# EAGLE board PCB-VU-SE-2 (EAGLE 6.4)
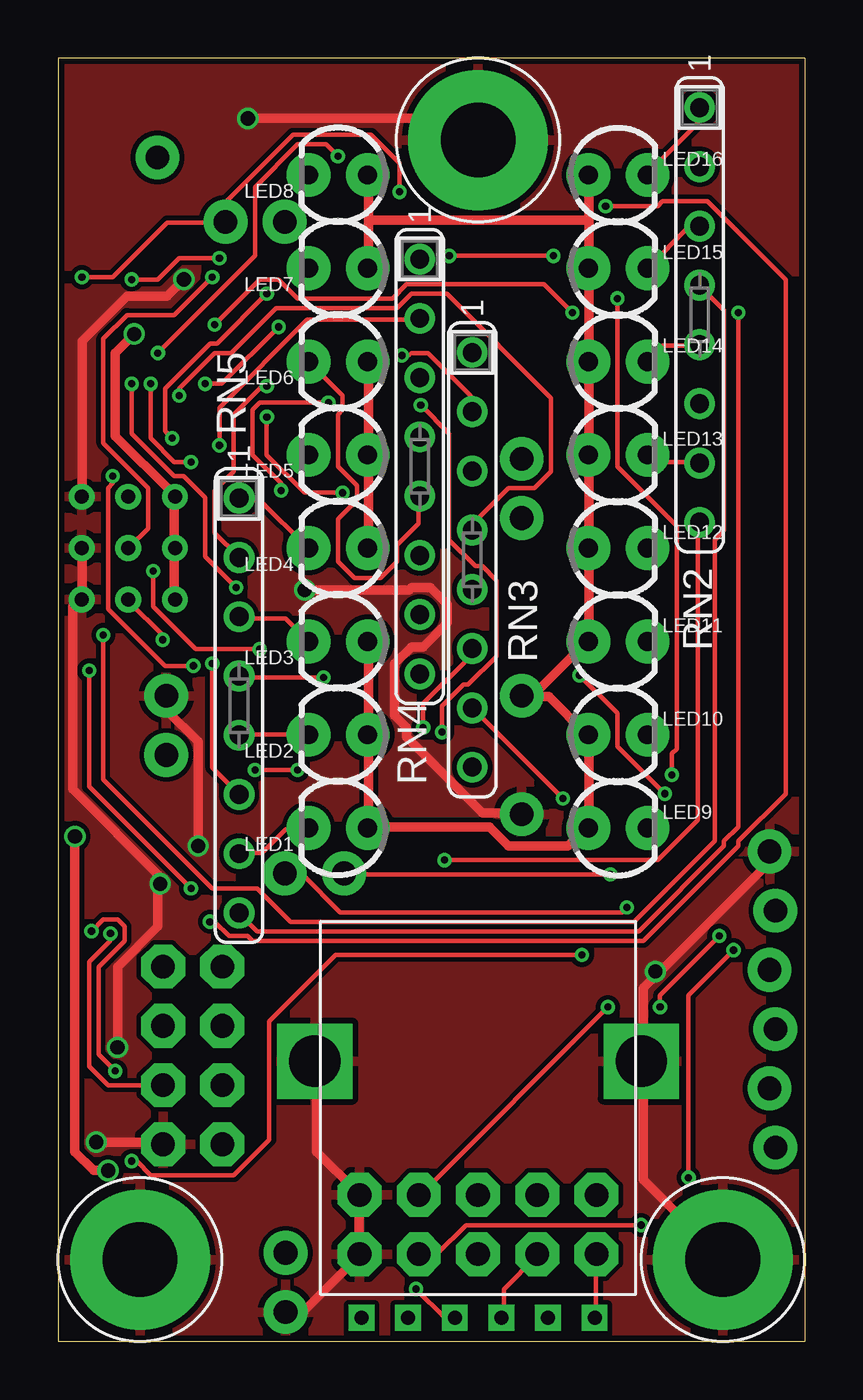
[diagram p0: board, top side]
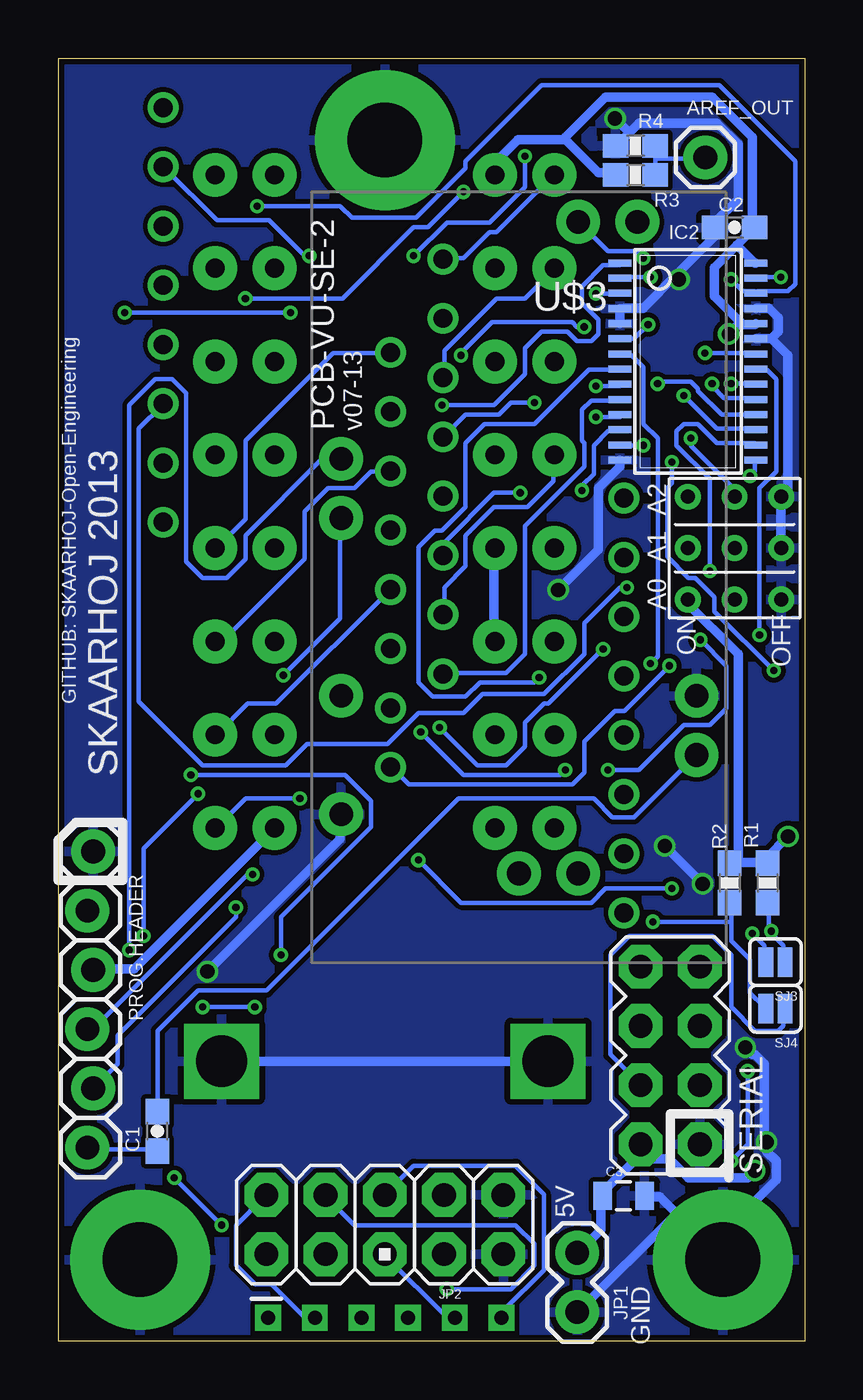
[diagram p1: board, bottom side, seen from below]

Size 32 x 55 mm. Coordinates in mm from the lower left corner, seen from the top.
Outline: 0,0 32,0 32,55 0,55 0,0
Copper layers (1*16): Top 0.035mm / dielectric 1.5mm / Bottom 0.035mm
Design rules "Fusion_eagle_rule_v1.1": minimum track width 6mil, minimum drill 12mil, track to track 6mil, track to pad 6mil, pad to pad 6mil, via to via 6mil, smd to smd 0mil, copper to edge 10mil, drill to drill 10mil, minimum pad ring 10mil, minimum via ring 6mil, stop-mask expansion 2mil, vias tented up to drill 100mil, thermal gap 10mil
Net classes: 0 default: width 0.203 mm, drill 0.305 mm, clearance 0.203 mm; 1 Power: width 0.406 mm, drill 0.61 mm, clearance 0.203 mm

## Footprints (pad centres in the part's own frame; a part is rotated, then mirrored left to right if it is on the bottom)
1X01 = drill 1.016 pad 1.88: 1 0,0
0603-CAP = smd 1.1 x 1: 1 -0.85,0; 2 0.85,0
0805 = smd 0.8 x 1.2: 1 -0.9,0; 2 0.9,0
TSSOP28 = smd 0.305 x 0.991: 1 -4.225,-2.918; 2 -3.575,-2.918; 3 -2.925,-2.918; 4 -2.275,-2.918; 5 -1.625,-2.918; 6 -0.975,-2.918; 7 -0.325,-2.918; 8 0.325,-2.918; 9 0.975,-2.918; 10 1.625,-2.918; 11 2.275,-2.918; 12 2.925,-2.918; 13 3.575,-2.918; 14 4.225,-2.918; 15 4.225,2.918; 16 3.575,2.918; 17 2.925,2.918; 18 2.275,2.918; 19 1.625,2.918; 20 0.975,2.918; 21 0.325,2.918; 22 -0.325,2.918; 23 -0.975,2.918; 24 -1.625,2.918; 25 -2.275,2.918; 26 -2.925,2.918; 27 -3.575,2.918; 28 -4.225,2.918
1X02 = drill 1.016 pad 1.88: 1 0,0; 2 2.54,0
AVR_ICSP = drill 1.016 pad 1.88 octagon: 1 -1.27,5.08; 2 1.27,5.08; 3 -1.27,2.54; 4 1.27,2.54; 5 -1.27,0; 6 1.27,0; 7 -1.27,-2.54; 8 1.27,-2.54; 9 -1.27,-5.08; 10 1.27,-5.08
LED3MM = drill 0.813 pad 1.88: A -1.27,0; K 1.27,0
1X06_LOCK = drill 1.016 pad 1.88: 1 0,0; 2 2.54,-0.254; 3 5.08,0; 4 7.62,-0.254; 5 10.16,0; 6 12.7,-0.254
0603-RES = smd 1.1 x 1: 1 -0.85,0; 2 0.85,0
SIL8 = drill 0.813: 1 -8.89,0; 2 -6.35,0; 3 -3.81,0; 4 -1.27,0; 5 1.27,0; 6 3.81,0; 7 6.35,0; 8 8.89,0
2X4 = drill 1.016 pad 1.88 octagon: 1 -3.81,-1.27; 2 -3.81,1.27; 3 -1.27,-1.27; 4 -1.27,1.27; 5 1.27,-1.27; 6 1.27,1.27; 7 3.81,-1.27; 8 3.81,1.27
SJ_2S = smd 0.635 x 1.27: 1 -0.412,0; 2 0.412,0
BEHRINGER_100K_POT = drill 2.2 square: GND1 -7,0; GND2 7,0 | drill 0.6 square: PAD1 -5,-11; PAD2 -3,-11; PAD3 -1,-11; PAD4 1,-11; PAD5 3,-11; PAD6 5,-11
ARDUINO_MINI_SE1 = drill 1.016 pad 1.88: 1 -7.62,7.62; 4 -7.62,5.08; 5 0,12.7; 6 -2.54,12.7; 8 -2.54,-15.24; 9 -5.08,-15.24; 17 7.62,-5.08; 18 7.62,-2.54; 21 7.62,5.08; 23 7.62,10.16
3.2MMPAD6MM = drill 3.2 pad 6: P$1 0,0
3BITADDR = drill 0.6: A0 -2.2,0; A1 0,0; A2 2.2,0; H1 -2.2,2; H2 0,2; H3 2.2,2; L1 -2.2,-2; L2 0,-2; L3 2.2,-2

## Placement (x,y rotation side)
AREF_OUT  M01PTH  [1X01]  4.25,50.75 0 bottom
C1  100nF  [0603-CAP]  27.75,9 90 bottom
C2  100nF  [0603-CAP]  3,47.75 180 bottom
C3  10uF  [0805]  7.76,6.23 0 bottom
IC2  PCA9685  [TSSOP28]  5,42 270 bottom
JP1  [1X02]  9.75,1.25 90 bottom
JP2  M05X2PTH  [AVR_ICSP]  18,5 90 bottom
LED1  [LED3MM]  12,22 180 top
LED2  [LED3MM]  12,26 180 top
LED3  [LED3MM]  12,30 180 top
LED4  [LED3MM]  12,34 180 top
LED5  [LED3MM]  12,38 180 top
LED6  [LED3MM]  12,42 180 top
LED7  [LED3MM]  12,46 180 top
LED8  [LED3MM]  12,50 180 top
LED9  [LED3MM]  24,22 0 top
LED10  [LED3MM]  24,26 0 top
LED11  [LED3MM]  24,30 0 top
LED12  [LED3MM]  24,34 0 top
LED13  [LED3MM]  24,38 0 top
LED14  [LED3MM]  24,42 0 top
LED15  [LED3MM]  24,46 0 top
LED16  [LED3MM]  24,50 0 top
PROG.HEADER  [1X06_LOCK]  30.5,21 270 bottom
R1  1K5  [0603-RES]  1.58,19.65 270 bottom
R2  1K5  [0603-RES]  3.21,19.65 270 bottom
R3  [0603-RES]  7.25,50 180 bottom
R4  [0603-RES]  7.25,51.25 0 bottom
RN2  [SIL8]  27.5,44 270 top
RN3  [SIL8]  17.75,33.5 270 top
RN4  [SIL8]  15.5,37.5 270 top
RN5  [SIL8]  7.75,27.25 270 top
SERIAL  M04X2  [2X4]  5.76,12.25 90 bottom
SJ3  SOLDERJUMPERNC  [SJ_2S]  1.25,16.25 180 bottom
SJ4  SOLDERJUMPERNC  [SJ_2S]  1.25,14.25 180 bottom
U$2  BEHRINGER_100K_POT  [BEHRINGER_100K_POT]  18,12 0 top
U$3  ARDUINO_MINI_SE1  [ARDUINO_MINI_SE1]  12.25,32.75 180 bottom
U$15  GNDPAD6MM  [3.2MMPAD6MM]  28.5,3.5 0 top
U$18  GNDPAD6MM  [3.2MMPAD6MM]  3.5,3.5 0 top
U$19  3BITADDR  [3BITADDR]  3,34 90 bottom
U$20  GNDPAD6MM  [3.2MMPAD6MM]  18,51.5 0 top

## Library data of the parts
AREF_OUT C1-C3 JP1 JP2 LED1-LED16 PROG.HEADER R1-R4 SERIAL SJ3 SJ4 = SparkFun
IC2 = wsmith
RN2-RN5 = SKAARHOJ; OC_FARNELL: unknown; OC_NEWARK: unknown
U$2 U$3 U$15 U$18-U$20 = SKAARHOJ

## Nets
5V [Power]: C2.1 C3.1 IC2.24 IC2.28 JP1.2 LED1.A LED2.A LED3.A LED4.A LED5.A LED6.A LED7.A LED8.A LED9.A LED10.A LED11.A LED12.A LED13.A LED14.A LED15.A LED16.A PROG.HEADER.3 R1.1 R2.1 R3.2 SERIAL.2 U$3.21 U$19.H1 U$19.H2 U$19.H3
A0: IC2.1 U$19.A0
A1: IC2.2 U$19.A1
A2: IC2.3 U$19.A2
AREF: AREF_OUT.1 R3.1 R4.2
DISP_DATA_OUT: SERIAL.6
GND [Power]: C2.2 C3.2 IC2.4 IC2.5 IC2.14 IC2.23 IC2.25 JP1.1 JP2.9 JP2.10 PROG.HEADER.1 R4.1 SERIAL.1 U$2.GND1 U$2.GND2 U$3.4 U$3.23 U$15.P$1 U$18.P$1 U$19.L1 U$19.L2 U$19.L3 U$20.P$1
I2C_SCL: IC2.26 R2.2 SJ4.2 U$3.8
I2C_SDA: IC2.27 R1.2 SJ3.1 U$3.9
L0: LED1.K RN5.7
L1: LED2.K RN5.5
L2: LED3.K RN5.3
L3: LED4.K RN5.1
L4: LED5.K RN4.7
L5: LED6.K RN4.5
L6: LED7.K RN4.3
L7: LED8.K RN4.1
L8: LED9.K RN3.7
L9: LED10.K RN3.5
L10: LED11.K RN3.3
L11: LED12.K RN3.1
L12: LED13.K RN2.7
L13: LED14.K RN2.5
L14: LED15.K RN2.3
L15: LED16.K RN2.1
N$1: JP2.6 U$2.PAD1
N$2: JP2.4 U$2.PAD3
N$3: SERIAL.3 SJ3.2
N$4: IC2.13 RN4.2
N$5: IC2.12 RN4.4
N$6: SERIAL.4 SJ4.1
N$7: IC2.11 RN4.6
N$8: JP2.3 U$2.PAD4
N$9: IC2.10 RN4.8
N$10: IC2.9 RN5.2
N$11: IC2.8 RN5.4
N$12: IC2.7 RN5.6
N$13: JP2.2 U$2.PAD5
N$14: JP2.5 U$2.PAD2
N$15: JP2.1 U$2.PAD6
N$16: JP2.8 U$3.18
N$17: JP2.7 U$3.17
N$19: IC2.6 RN5.8
N$20: IC2.15 RN3.8
N$21: IC2.16 RN3.6
N$22: IC2.17 RN3.4
N$23: IC2.18 RN3.2
N$24: IC2.19 RN2.8
N$25: IC2.20 RN2.6
N$26: IC2.21 RN2.4
N$27: IC2.22 RN2.2
N$37: C1.2 U$3.1
PH6: C1.1 PROG.HEADER.6
RX: PROG.HEADER.4 U$3.5
SDI_MOSI: SERIAL.8
SDI_SCLK: SERIAL.7
SLIDER_IN: SERIAL.5
TX: PROG.HEADER.5 U$3.6

## Tracks (layer width: path | path; a pad name or v marks a point on that pad's centre or on a via)
5V  (via drill 0.61)
  Top 0.406: U$19.H1 4.98,31.8 4.98,33.83 U$19.H2 4.98,34.04 4.98,36.17 U$19.H3 4.88,36.37 2.44,38.81 2.44,42.37 v3.25,43.18 | v2.13,7.32 1.52,7.32 0.71,8.13 v0.71,21.64 | LED6.A 13.31,41.96 13.31,38.1 LED5.A 13.31,37.9 13.31,34.04 LED4.A | LED3.A 13.31,29.97 13.31,26.11 LED2.A 13.31,25.91 13.31,22.05 LED1.A 13.51,22.05 18.49,22.05 19.3,21.23 21.84,21.23 22.55,21.95 LED9.A 22.76,22.05 22.76,25.81 LED10.A 22.66,26.01 21.03,27.64 19.91,27.64 U$3.21 20.42,27.74 22.66,29.97 LED11.A 22.76,30.18 22.76,33.93 LED12.A 22.76,34.14 22.76,38 LED13.A 22.76,38.2 22.76,41.96 LED14.A 22.76,42.16 22.76,45.92 LED15.A 22.76,46.13 22.76,48.06 | 13.31,48.06 13.31,49.99 LED8.A | 13.31,48.06 13.31,46.02 LED7.A | 22.76,48.06 22.76,49.99 LED16.A | 22.76,48.06 13.31,48.06
  Bottom 0.406: JP1.2 9.65,3.86 8.74,4.78 8.74,6.2 C3.1 8.64,6.4 7.11,7.92 7.11,8.43 SERIAL.2 7.01,7.82 5.79,7.82 4.98,7.01 2.44,7.01 v2.13,7.32 | U$19.H1 5.08,31.7 2.85,29.46 2.85,20.62 R2.1 3.15,20.52 1.63,20.52 R1.1 1.63,20.73 v0.71,21.64 | LED3.A 13.31,30.07 13.31,33.93 LED4.A | 2.74,43.69 3.86,44.81 3.86,46.02 2.9,46.99 | 2.74,43.69 2.64,43.59 2.13,43.59 IC2.24 | 2.9,46.99 2.23,47.65 C2.1 2.23,47.85 2.23,51.61 3.96,53.34 8.53,53.34 10.26,51.61 10.26,51.51 | 2.9,46.99 2.13,46.23 IC2.28 | 10.26,51.51 8.84,50.09 8.13,50.09 R3.2 | 10.26,51.51 12.29,51.51 13.21,50.6 13.21,50.09 LED8.A | PROG.HEADER.3 30.48,15.95 28.75,15.95 22.76,21.95 LED9.A | 2.74,43.69 v3.25,43.18
A0  (via drill 0.3)
  Top 0.203: v15.54,40.13 16.76,38.91 16.76,34.34 17.88,33.22 18.19,33.22 18.8,32.61 18.8,29.36 17.58,28.14 17.37,28.14 16.46,27.23 v16.46,26.11 | v8.43,24.49 v10.26,24.49 | v4.47,30.07 4.47,30.28 3.05,31.7 U$19.A0
  Bottom 0.203: v15.54,40.13 13.31,40.13 11.99,41.45 11.99,42.57 11.28,43.28 10.16,43.28 9.75,42.88 9.14,42.88 8.84,43.18 8.84,43.79 9.55,44.5 9.55,45.21 8.64,46.13 7.92,46.13 IC2.1 | v16.46,26.11 14.63,24.28 10.46,24.28 v10.26,24.49 | v8.43,24.49 7.11,24.49 5.18,26.42 4.06,26.42 3.35,27.13 3.35,28.96 v4.47,30.07
A1  (via drill 0.3)
  Top 0.203: v6.6,45.62 4.98,43.99 2.95,43.99 1.93,42.98 1.93,38.51 3.86,36.58 3.86,34.85 3.05,34.04 U$19.A1
  Bottom 0.203: v6.6,45.62 7.82,45.62 IC2.2
A2  (via drill 0.3)
  Top 0.203: v8.94,44.91 6.81,42.77 6.5,42.77 4.57,40.84 4.57,39.01 v4.88,38.71
  Bottom 0.203: v8.94,44.91 7.92,44.91 IC2.3 | v4.88,38.71 4.88,38.41 3.05,36.58 3.05,36.27 U$19.A2
AREF
  Bottom 0.203: 6.4,50.7 6.4,51.21 R4.2 | 6.4,50.7 6.4,50.09 R3.1 | 6.4,50.7 4.27,50.7 AREF_OUT.1
GND  (via drill 0.61)
  Top 0.406: U$19.L2 1.02,33.93 1.02,31.8 U$19.L1 0.81,31.7 0.61,31.5 0.61,23.67 4.37,19.91 v4.37,19.61 4.27,19.51 4.27,17.78 2.54,16.05 v2.54,12.6 | v5.99,21.23 5.99,25.7 4.67,27.03 4.67,27.64 U$3.4 | v8.13,52.43 17.07,52.43 17.98,51.51 U$20.P$1 | v5.38,45.52 4.67,44.81 2.95,44.81 1.02,42.88 1.02,36.27 U$19.L3 | JP1.1 9.75,1.32 10.57,1.32 12.9,3.66 JP2.9 12.9,3.86 12.9,6.2 JP2.10 12.8,6.4 11.07,8.13 11.07,11.99 U$2.GND1 | v1.63,8.53 4.47,8.53 SERIAL.1 | v10.57,32.21 15.04,32.21 15.14,32.31 15.95,32.31 16.66,31.6 16.66,30.79 15.65,29.77 15.14,29.77 14.43,29.06 14.43,26.82 14.94,26.31 14.94,25.91 18.19,22.66 19.81,22.66 U$3.23 | 25.7,15.75 25.09,15.14 25.09,12.09 U$2.GND2 25.09,11.89 25.09,6.91 28.45,3.56 U$15.P$1 | 25.7,15.75 30.48,20.52 30.48,20.93 PROG.HEADER.1 | v25.6,15.85 25.7,15.75
  Bottom 0.406: 1.42,42.98 2.03,42.98 IC2.23 | 1.42,42.98 1.12,43.28 1.12,43.89 1.52,44.3 2.03,44.3 IC2.25 | 1.42,42.98 0.71,42.27 0.71,36.47 0.91,36.27 U$19.L3 1.02,36.07 1.02,34.04 U$19.L2 | v4.37,19.61 v5.99,21.23 | IC2.5 7.92,43.69 7.92,44.2 IC2.4 7.72,44.3 6.91,44.3 5.49,45.72 | 5.49,45.72 3.86,47.35 3.86,47.65 C2.2 3.86,47.95 2.85,48.97 2.85,51.31 3.76,52.22 7.11,52.22 7.52,51.82 | 7.52,51.82 8.03,51.31 R4.1 | v8.13,52.43 7.52,51.82 | v5.38,45.52 5.38,45.62 5.49,45.72 | U$18.P$1 6.2,6.2 6.81,6.2 C3.2 | U$18.P$1 3.96,4.17 1.22,6.91 1.22,7.72 1.63,8.13 v1.63,8.53 1.73,8.64 1.73,11.89 2.13,12.29 2.23,12.29 v2.54,12.6 | JP1.1 9.65,1.32 5.59,5.38 U$18.P$1 | v10.57,32.21 8.84,33.93 8.84,36.58 7.92,37.49 7.92,37.69 IC2.14 | v25.6,15.85 19.91,21.54 19.91,22.55 U$3.23 | U$2.GND1 11.07,11.99 U$2.GND2
  pour Top: 0,0 32,0 32,55 0,55
  pour Bottom: 0,0 32,0 32,55 0,55
I2C_SCL  (via drill 0.3)
  Top 0.203: v3.15,45.52 4.27,45.52 5.18,46.43 v6.91,46.43 | v6.5,17.98 6.71,17.98 7.32,17.37 8.13,17.37 8.33,17.17 25.09,17.17 29.16,21.23 29.16,21.44 31.19,23.47 31.19,45.52 27.84,48.87 25.91,48.87 25.7,48.67 v23.47,48.67
  Bottom 0.203: 3.15,17.98 3.15,17.17 2.34,16.36 2.34,14.94 1.73,14.33 SJ4.2 | 3.15,17.98 3.15,18.69 R2.2 | v3.15,45.52 2.64,45.01 2.13,45.01 IC2.26 2.03,45.01 0.71,45.01 0.41,45.31 0.41,50.6 3.66,53.85 11.28,53.85 14.53,50.6 14.53,50.29 16.66,48.16 19.41,48.16 19.91,48.67 v23.47,48.67 | v6.91,46.43 7.21,46.74 8.43,46.74 9.65,47.95 U$3.8 | v6.5,17.98 3.15,17.98
I2C_SDA  (via drill 0.3)
  Top 0.203: v1.02,45.62 2.34,45.62 4.67,47.95 6.3,47.95 | 6.3,47.95 7.11,47.95 U$3.9 6.3,47.95 | v1.42,17.58 1.93,18.09 2.54,18.09 2.85,17.78 2.85,17.17 1.73,16.05 1.73,12.29 v2.44,11.58 | v3.15,7.72 3.35,7.72 3.96,7.11 7.52,7.11 9.04,8.64 9.04,13.72 11.89,16.56 v22.45,16.56 | v26.31,24.28 26.31,25.2 26.52,25.4 26.52,34.95 23.98,37.49 v23.98,44.7 | v14.63,49.28 14.63,50.49 13.41,51.71 10.06,51.71 6.3,47.95
  Bottom 0.203: 1.47,17.53 0.91,16.97 0.91,16.26 SJ3.1 | 1.47,17.53 1.52,17.58 1.52,18.69 R1.2 | v1.02,45.62 2.03,45.62 IC2.27 | v2.44,11.58 2.44,8.43 v3.15,7.72 | v22.45,16.56 22.45,18.19 18.59,22.05 18.59,23.16 19.71,24.28 v26.31,24.28 | v23.98,44.7 19.81,44.7 16.76,47.75 16.15,47.75 v14.63,49.28 | v1.42,17.58 1.47,17.53
L0
  Top 0.203: RN5.7 7.82,20.93 8.74,20.93 9.75,21.95 10.67,21.95 LED1.K
L1
  Top 0.203: RN5.5 7.82,26.01 10.67,26.01 LED2.K
L2
  Top 0.203: RN5.3 7.82,30.99 9.75,30.99 10.67,30.07 LED3.K
L3
  Top 0.203: RN5.1 7.82,36.07 8.64,36.07 10.67,34.04 LED4.K
L4
  Bottom 0.203: RN4.7 15.44,31.19 15.44,32.31 14.53,33.22 14.53,34.54 13.31,35.76 11.89,35.76 10.77,36.88 10.77,38 LED5.K
L5
  Top 0.203: RN4.5 15.44,36.17 15.44,35.05 14.53,34.14 14.53,33.43 13.82,32.72 12.7,32.72 11.99,33.43 11.99,35.26 12.8,36.07 12.8,36.68 11.99,37.49 11.99,39.73 12.19,39.93 12.19,40.54 10.77,41.96 LED6.K
L6
  Bottom 0.203: RN4.3 15.44,41.35 15.44,42.47 13.21,44.7 11.99,44.7 10.77,45.92 LED7.K
L7
  Bottom 0.203: RN4.1 15.44,46.43 14.63,46.43 13.51,47.55 13.21,47.55 10.77,49.99 LED8.K
L8  (via drill 0.3)
  Top 0.203: v21.64,23.27 17.78,27.13 RN3.7
  Bottom 0.203: v21.64,23.27 23.98,23.27 25.2,22.05 LED9.K
L9
  Bottom 0.203: RN3.5 17.78,32.21 22.66,27.33 23.88,27.33 25.2,26.01 LED10.K
L10
  Bottom 0.203: RN3.3 17.78,37.29 18.59,37.29 19.3,36.58 20.42,36.58 21.44,35.56 21.44,33.53 24.89,30.07 25.2,30.07 LED11.K
L11
  Bottom 0.203: RN3.1 17.78,42.37 20.22,42.37 23.98,38.61 23.98,35.26 25.2,34.04 LED12.K
L12
  Top 0.203: RN2.7 27.43,37.69 25.6,37.69 25.3,38 LED13.K
L13
  Top 0.203: RN2.5 27.43,42.67 25.91,42.67 25.3,42.06 LED14.K
L14
  Top 0.203: RN2.3 27.43,47.75 27.03,47.75 25.3,46.02 LED15.K
L15
  Top 0.203: RN2.1 27.43,52.83 27.43,52.22 25.3,50.09 LED16.K
N$1
  Bottom 0.203: U$2.PAD1 12.9,1.02 12.9,1.32 11.18,3.05 11.18,6.3 12.39,7.52 16.76,7.52 17.98,6.3 JP2.6
N$2  (via drill 0.3)
  Top 0.203: v15.34,2.23 16.56,1.02 16.97,1.02 U$2.PAD3
  Bottom 0.203: v15.34,2.23 12.6,2.23 11.58,3.25 11.58,4.17 12.39,4.98 19.3,4.98 20.52,6.2 JP2.4
N$3  (via drill 0.3)
  Top 0.203: v2.23,17.48 2.23,17.17 1.32,16.26 1.32,11.79 2.13,10.97 4.47,10.97 SERIAL.3
  Bottom 0.203: v2.23,17.48 1.73,16.97 1.73,16.26 SJ3.2
N$4  (via drill 0.3)
  Top 0.203: v6.91,38.41 6.91,40.03 10.67,43.79 15.44,43.79 RN4.2
  Bottom 0.203: v6.91,38.41 7.82,38.41 IC2.13
N$5  (via drill 0.3)
  Top 0.203: v9.55,36.47 9.55,36.78 8.33,38 8.33,39.93 8.64,40.23 v11.58,40.23
  Bottom 0.203: v9.55,36.47 9.55,36.68 9.04,37.19 9.04,38.41 8.43,39.01 7.92,39.01 IC2.12 | v11.58,40.23 12.6,40.23 13.11,39.73 14.53,39.73 15.44,38.81 RN4.4
N$6
  Bottom 0.203: SJ4.1 0.91,14.22 0.91,13.51 1.12,13.31 2.13,13.31 3.15,14.33 3.15,16.56 3.96,17.37 7.52,17.37 8.33,16.56 8.33,12.29 7.11,11.07 SERIAL.4
N$7  (via drill 0.3)
  Top 0.203: v8.94,39.62 8.94,38 10.57,36.37 v12.19,36.37
  Bottom 0.203: v8.94,39.62 7.92,39.62 IC2.11 | v12.19,36.37 13.31,36.37 15.44,34.24 15.44,33.73 RN4.6
N$8
  Top 0.203: U$2.PAD4 19.1,1.02 19.1,2.23 20.52,3.66 JP2.3
N$9
  Bottom 0.203: IC2.10 7.92,40.34 9.14,40.34 9.55,39.93 9.55,38.61 9.45,38.51 9.45,37.49 11.99,34.95 11.99,29.46 12.8,28.65 15.44,28.65 RN4.8
N$10  (via drill 0.3)
  Top 0.203: v8.94,40.95 8.74,40.95 7.52,39.73 7.52,37.29 6.71,36.47 6.71,34.65 7.72,33.63 RN5.2
  Bottom 0.203: v8.94,40.95 7.92,40.95 IC2.9
N$11  (via drill 0.3)
  Top 0.203: v11.38,28.45 7.82,28.45 RN5.4
  Bottom 0.203: v11.38,28.45 11.58,28.25 13.92,28.25 14.53,27.64 15.95,27.64 16.56,28.25 16.56,34.04 15.85,34.75 15.54,34.75 14.53,35.76 14.53,38.51 13.72,39.32 11.58,39.32 9.25,41.66 7.92,41.66 IC2.8
N$12  (via drill 0.3)
  Top 0.203: v6.6,29.06 6.6,24.59 7.72,23.47 RN5.6
  Bottom 0.203: v6.6,29.06 6.3,29.36 6.3,38.71 6.91,39.32 6.91,41.76 7.42,42.27 7.82,42.27 IC2.7
N$13
  Bottom 0.203: U$2.PAD5 21.03,1.02 21.44,1.02 22.86,2.44 23.57,2.44 24.38,3.25 24.38,4.98 23.16,6.2 JP2.2
N$14
  Bottom 0.203: U$2.PAD2 15.04,1.02 15.34,1.02 17.98,3.66 JP2.5
N$15
  Top 0.203: U$2.PAD6 23.06,1.02 23.06,3.66 JP2.1
N$16  (via drill 0.3)
  Top 0.203: v23.57,14.33 15.54,6.3 JP2.8 | v25.81,14.33 25.81,14.83 v28.35,17.37 | v26.01,23.47 23.98,25.5 23.98,26.92 v22.35,28.55
  Bottom 0.203: v25.81,14.33 v23.57,14.33 | v28.35,17.37 28.35,21.13 v26.01,23.47 | v22.35,28.55 19.91,30.99 19.91,35.26 U$3.18
N$17  (via drill 0.3)
  Top 0.203: v24.99,4.98 17.48,4.98 16.26,3.76 15.54,3.76 JP2.7 | v27.03,7.01 27.03,14.83 v28.96,16.76
  Bottom 0.203: v27.03,7.01 v24.99,4.98 | v28.96,16.76 28.96,40.13 27.84,41.25 27.13,41.25 26.52,40.64 26.52,33.43 25.81,32.72 24.79,32.72 23.98,33.53 23.98,34.54 20.73,37.8 19.91,37.8 U$3.17
N$19  (via drill 0.3)
  Top 0.203: v6.71,43.59 8.64,45.52 9.45,45.52 10.26,44.7 14.33,44.7 14.94,45.31 20.83,45.31 v22.05,44.09 | v29.16,44.09 29.16,22.05 28.55,21.44 28.55,21.23 24.89,17.58 8.53,17.58 7.82,18.29 RN5.8
  Bottom 0.203: v6.71,43.59 7.32,42.98 7.82,42.98 IC2.6 | v29.16,44.09 v22.05,44.09
N$20  (via drill 0.3)
  Top 0.203: v2.34,37.08 2.34,36.78 2.13,36.58 2.13,31.39 4.57,28.96 v5.79,28.96
  Bottom 0.203: v2.34,37.08 2.13,37.29 2.13,37.69 IC2.15 | v5.79,28.96 7.72,27.03 8.13,27.03 9.45,25.7 9.45,24.38 9.96,23.88 16.97,23.88 17.68,24.59 RN3.8
N$21  (via drill 0.3)
  Top 0.203: v4.06,33.02 4.06,31.5 5.89,29.67 v8.64,29.67 | v15.65,26.31 15.65,27.33 17.68,29.36 17.68,29.67 RN3.6
  Bottom 0.203: v4.06,33.02 4.06,36.98 5.49,38.41 5.49,39.01 5.18,39.32 4.57,39.32 3.76,38.51 2.13,38.51 IC2.16 | v8.64,29.67 10.97,27.33 11.18,27.33 11.99,26.52 11.99,25.5 12.8,24.69 14.02,24.69 v15.65,26.31
N$22  (via drill 0.3)
  Top 0.203: v5.18,40.54 5.18,40.84 6.71,42.37 7.42,42.37 9.35,44.3 14.53,44.3 15.14,44.91 16.66,44.91 21.13,40.44 21.13,37.29 20.42,36.58 19.3,36.58 17.78,35.05 17.78,34.85 RN3.4
  Bottom 0.203: v5.18,40.54 3.76,39.12 2.13,39.12 IC2.17
N$23  (via drill 0.3)
  Top 0.203: v6.3,41.05 7.01,41.05 v9.45,43.48 | v14.73,42.27 15.04,42.27 15.14,42.37 15.85,42.37 17.68,40.54 17.68,39.93 RN3.2
  Bottom 0.203: v6.3,41.05 6.2,41.15 4.88,41.15 4.57,40.84 4.57,40.74 3.56,39.73 2.13,39.73 IC2.18 | v9.45,43.48 9.75,43.48 9.96,43.69 13.41,43.69 14.73,42.37 v14.73,42.27
N$24  (via drill 0.3)
  Top 0.203: v3.96,41.05 3.96,38.71 4.98,37.69 v5.69,37.69 | v1.32,28.75 1.32,23.77 v5.69,19.41 | v16.56,20.62 25.7,20.62 27.43,22.35 27.43,35.05 RN2.8
  Bottom 0.203: v3.96,41.05 3.96,40.95 3.45,40.44 2.13,40.44 IC2.19 | v5.69,37.69 5.69,36.78 5.89,36.58 5.89,33.63 4.98,32.72 4.67,32.72 3.86,31.9 3.86,31.29 v1.32,28.75 | v5.69,19.41 8.53,19.41 9.14,18.8 14.73,18.8 v16.56,20.62
N$25  (via drill 0.3)
  Top 0.203: v3.15,41.05 3.15,38.91 4.98,37.08 5.38,37.08 6.3,36.17 6.3,33.63 v7.62,32.31
  Bottom 0.203: v3.15,41.05 2.13,41.05 IC2.20 | v7.62,32.31 7.92,32.31 9.45,30.79 9.45,29.46 11.18,27.74 13.82,27.74 14.63,26.92 16.56,26.92 17.88,25.6 21.34,25.6 22.25,24.69 25.81,24.69 28.55,27.43 28.55,39.12 27.53,40.13 RN2.6
N$26  (via drill 0.3)
  Top 0.203: v1.93,30.28 1.93,24.08 6.6,19.41 8.53,19.41 9.96,17.98 24.69,17.98 28.14,21.44 28.14,34.34 28.55,34.75 28.55,44.2 27.53,45.21 RN2.4
  Bottom 0.203: v1.93,30.28 1.93,36.58 1.22,37.29 1.22,41.25 1.63,41.66 2.03,41.66 IC2.21
N$27  (via drill 0.3)
  Top 0.203: v4.27,42.37 8.43,46.53 8.43,49.48 10.26,51.31 11.48,51.31 v11.99,50.8 | v21.23,46.53 v16.76,46.53
  Bottom 0.203: v4.27,42.37 2.13,42.37 IC2.22 | v11.99,50.8 11.99,49.48 13.51,47.95 15.34,47.95 v16.76,46.53 | v21.23,46.53 21.44,46.53 22.96,48.06 25.2,48.06 27.43,50.29 RN2.2
N$37
  Bottom 0.203: C1.2 27.74,9.86 27.74,13.31 26.01,15.04 23.06,15.04 14.83,23.27 9.04,23.27 8.23,22.45 7.32,22.45 4.67,25.09 U$3.1
PH6
  Bottom 0.203: C1.1 27.84,8.23 30.68,8.23 PROG.HEADER.6
RX  (via drill 0.3)
  Top 0.203: v23.67,20.02 12.29,20.02 U$3.5
  Bottom 0.203: v23.67,20.02 23.88,20.02 30.48,13.41 30.68,13.41 PROG.HEADER.4
TX  (via drill 0.3)
  Top 0.203: v24.38,18.59 24.18,18.39 12.09,18.39 10.46,20.02 9.75,20.02 U$3.6
  Bottom 0.203: v24.38,18.59 24.38,18.19 29.46,13.11 29.46,11.89 30.48,10.87 PROG.HEADER.5

## Text on the board
_bsilk: GITHUB: SKAARHOJ-Open-Engineering | v07-13 | PCB-VU-SE-2 | SKAARHOJ 2013 | 5V | GND